# Altium PCB STM32 + RF + USB.PcbDoc
Units mil, origin at the board's own origin, x right, y up, seen from the top; angles counter-clockwise.
Board outline 2807.27 x 1237.86 mil, 2 copper layers (Top Layer, Bottom Layer); 43 components, 33 nets, 163 pads, 92 vias.
Unrouted connection lines stored in the file: 83.
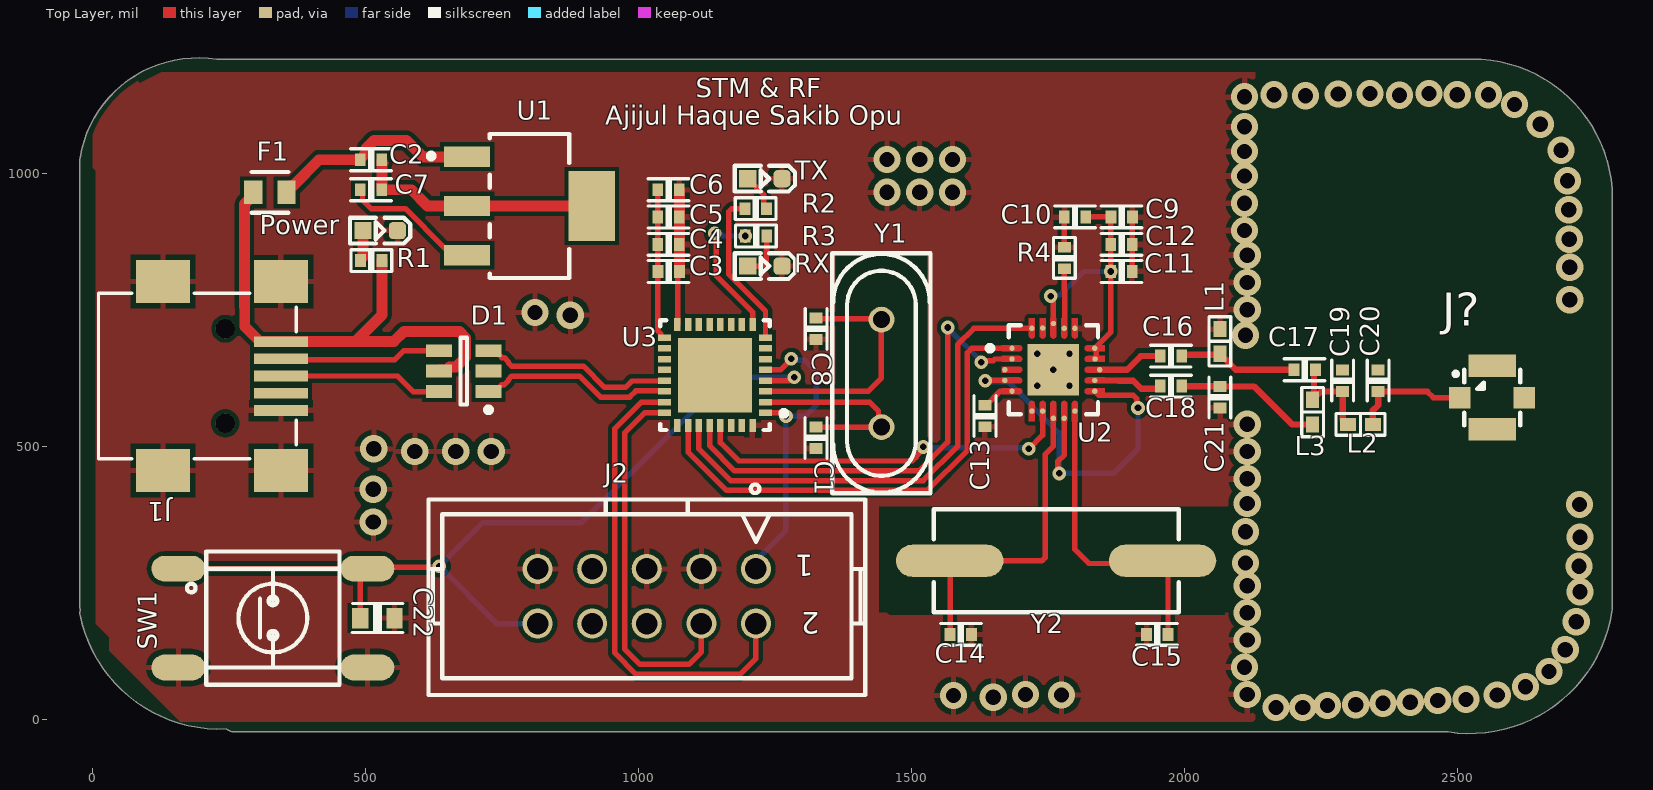
[diagram p0: Top Layer view]
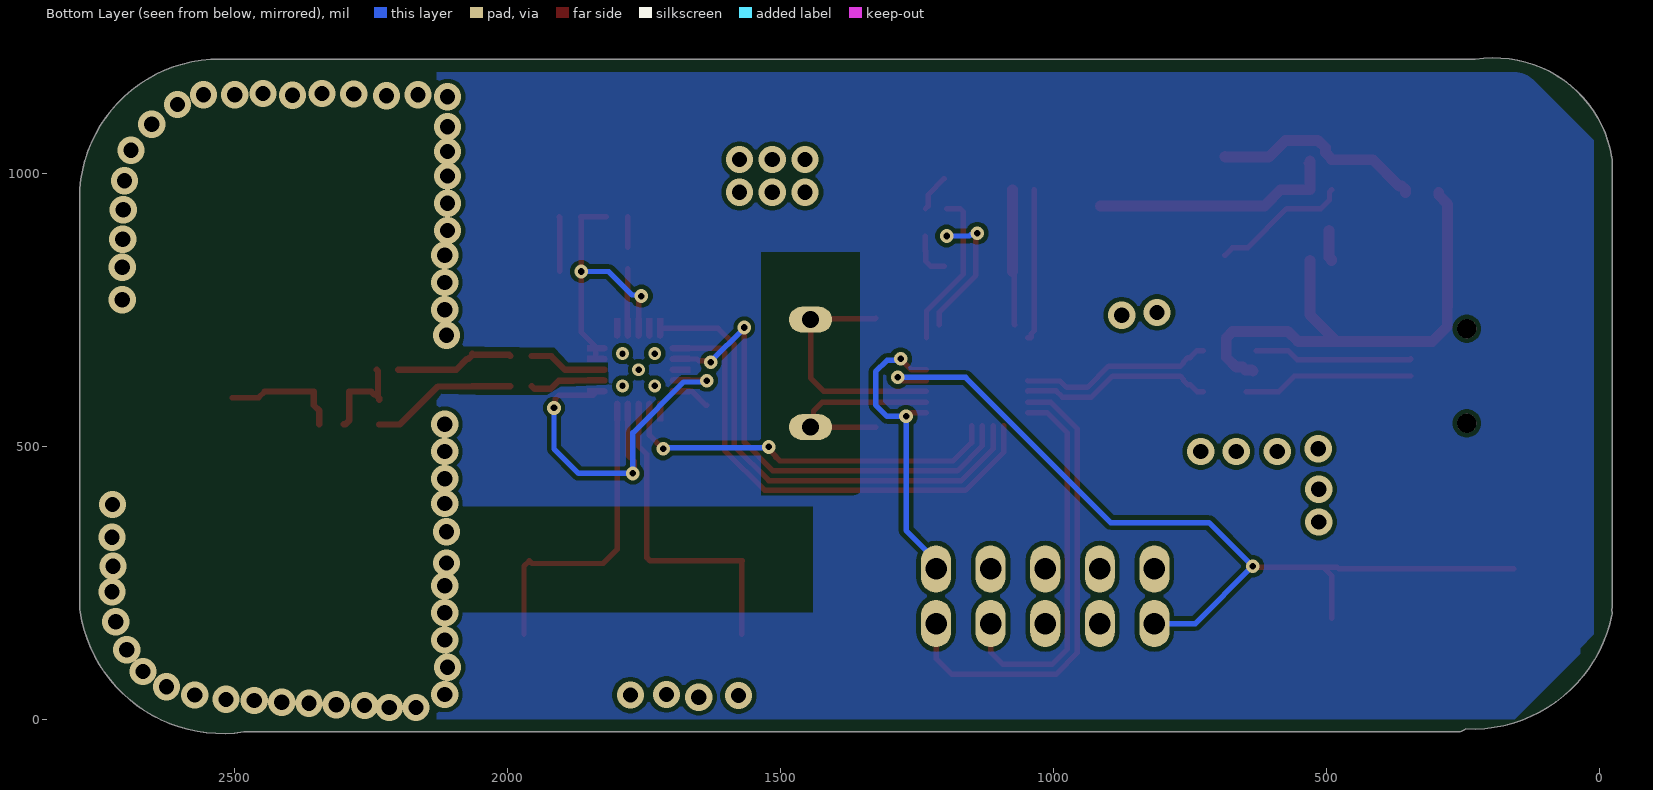
[diagram p1: Bottom Layer view, seen from below]

## Layer stack, top to bottom
Top Solder: solder mask 0.4, Solder Resist, Dk 3.5
Top Layer: signal copper 1.4
Dielectric 1: dielectric 12.6, FR-4, Dk 4.8
Bottom Layer: signal copper 1.4
Bottom Solder: solder mask 0.4, Solder Resist, Dk 3.5

## Board outline
-23.16,190.27 cw(c0,195) -23.1,200 cw(c0,205) -23.64,205 -23.64,1025 -23.31,1028.93 cw(c192.5,992.5) 226.92,1208.64 2509.13,1208.64 cw(c2527.5,952.5) 2783.57,971.77 2783.64,970 2783.64,200 2783.35,196.31 cw(c2522.5,237.5) 2483.19,-23.64 260,-23.64 cw(c260,0) 244.85,-18.15 cw(c232.5,242.5)

## Design rules (kind name [scope] priority, off if disabled: settings)
Clearance "Stitching GND" [IsStitchingVia and InNet('GND') vs (IsVia and (Not IsStitchingVia)) Or IsPad] p1: gap=5 ignorepadtopadclearanceinfootprint=TRUE
Clearance [All] p2: gap=8 ignorepadtopadclearanceinfootprint=TRUE
DiffPairsRouting [InDifferentialPair('NewDifferentialPair2')] p1: maxlimit=10 minlimit=8 mostfreqgap=8 toplayer_minwidth=10 toplayer_maxwidth=15 toplayer_prefwidth=10 bottomlayer_minwidth=10 bottomlayer_maxwidth=15 bottomlayer_prefwidth=10 maxuncoupledlength=500
PolygonConnect [All] p1: connectstyle=Relief reliefconductorwidth=10 reliefentries=4 polygonreliefangle="90 Angle" airgapwidth=10
RoutingVias [All] p1: holewidth=12 width=25 viastyle="Through Hole" minholewidth=12 minwidth=25 maxholewidth=12 maxwidth=25
SolderMaskExpansion [All] p1: expansion=4 istentingtop=FALSE
Width [All] p1: maxlimit=25 minlimit=8 preferedwidth=10
29 further rules are at their usual default settings.

## Classes and differential pairs
net class diff90: D_+ D_- USB_D_+ USB_D_-
differential pair NewDifferentialPair2: +D_+ -D_-
differential pair NewDifferentialPair1: +USB_D_+ -USB_D_-

## Components (designator, comment, footprint, x,y, rotation, side; value= is the part's Value field where it differs from the comment)
C1 "10uf" "CAP 0402_1005" 1324.76,515.38 r270 top value=100nF
C2 "10uf" "CAP 0402_1005" 510,1025 r180 top value=100nF
C3 "1uf" "CAP 0402_1005" 1055.38,820.24 r180 top value=100nF
C4 "100nf" "CAP 0402_1005" 1055,870 r180 top value=100nF
C5 "100nf" "CAP 0402_1005" 1055,920 r180 top value=100nF
C6 "100nf" "CAP 0402_1005" 1055,970 r180 top value=100nF
C7 "10uf" "CAP 0402_1005" 510,970 r180 top value=100nF
C8 "10uf" "CAP 0402_1005" 1325,715 r270 top value=100nF
C9 "10uf" "CAP 0402_1005" 1885.38,920.24 r180 top value=100nF
C10 "10nf" "CAP 0402_1005" 1799.62,919.76 r0 top value=100nF
C11 "10nf" "CAP 0402_1005" 1884.75,820.24 r180 top value=100nF
C12 "10nf" "CAP 0402_1005" 1885,870 r180 top value=100nF
C13 "100nf" "CAP 0402_1005" 1635,555 r90 top value=100nF
C14 "22pf" "CAP 0402_1005" 1590.25,154.76 r0 top value=100nF
C15 "22pf" "CAP 0402_1005" 1950.38,155.24 r180 top value=100nF
C16 "100pf" "CAP 0402_1005" 1975.38,665.24 r180 top value=100nF
C17 "1pf" "CAP 0402_1005" 2220.38,640.24 r180 top value=100nF
C18 "100pf" "CAP 0402_1005" 1975.38,610.24 r180 top value=100nF
C19 "1.8pf" "CAP 0402_1005" 2290.24,619.62 r90 top value=100nF
C20 "1.5pf" "CAP 0402_1005" 2355.24,619.89 r90 top value=100nF
C21 "1pf" "CAP 0402_1005" 2064.76,589.75 r270 top value=100nF
C22 "10uf" "CAP 0603_1608" 521.5,185 r0 top value=100nF
D1 "USBLC6-2SC6" STM-SOT23-6L_V 679.72,637.4 r180 top
F1 "F0603G0R10FNTR" FP-F0603G-MFG 324.49,965 r0 top value=2.4Ω
J1 "Mini USB 2.0 Type B" 65100516121 192.44,628.5 r270 top
J2 "CONN_JTAG" IDC_2X5 1015,225 r180 top
J? "UFL" "MOLEX SD-734120110" 2564,589 r270 top
L1 "1.2nH" "IND 0402_1005" 2064.98,693.16 r270 top
L2 "1.2nH" "IND 0402_1005" 2323.79,540.02 r180 top
L3 "1.2nH" "IND 0402_1005" 2235.02,561.21 r90 top
Power "LED SMD 0603 RED" LED_0603_BLUE 526.5,895 r0 top
R1 "1K" "RES 0402_1005" 510.32,840 r0 top
R2 "1K" "RES 0402_1005" 1214.68,935 r180 top
R3 "1K" "RES 0402_1005" 1215.32,885 r180 top
R4 "56k" "RES 0402_1005" 1780,844.68 r90 top value=1K
RX "LED SMD 0603 GREEN" LED_0603_GREEN 1231.5,830 r0 top
SW1 "Tactile 4PIN 6X6mm H4.5mm (SMD)" SWPBS_SPDT_6X6X5 330,185 r0 top
TX "LED SMD 0603 BLUE" LED_0603_RED 1231.5,990 r0 top
U1 "LM3940IMP-3.3/NOPB" FP-DCY0004A-MFG 800,940 r0 top
U2 "CC2500RGPR" FP-RGP0020C-MFG 1760,640 r0 top
U3 "STM32L432KBU6" FP-UFQFPN32-A0B8-MFG 1140,630 r180 top
Y1 "32kHz" "HC-49S THT" 1445,633.43 r270 top value=8.0MHZ
Y2 "25MHz" "HC-49S SMD" 1765,290 r180 top

## Footprints (in the part's own frame and the unit in brackets; to place one, negate y for a bottom-side part, rotate by r counter-clockwise, add the part's x,y. Pads: shape width x height; smd on the part's side, far side on the other; paste and mask are expansions set on the pad)
65100516121 [mm] "Mini USB 2.0 Type B SMT Horizontal 5 Contacts"
  rect 0.5x2.5 smd: 1(-1.6,3.875) 2(-0.8,3.875) 3(0,3.875) 4(0.8,3.875) 5(1.6,3.875)
  round 0.9 hole 0.9 unplated: M1(-2.2,1.275) M2(2.2,1.275)
  rect 2x2.5 smd: S1(-4.4,3.875) S2(4.4,3.875) S3(-4.4,-1.625) S4(4.4,-1.625)
  silkscreen extent -3.85,-4.62 3.85,4.58, body extent -4.8,-4.63 4.8,4.62, height 3.92
"CAP 0402_1005" [mm] "Chip Capacitor, 2-Leads, Body 1.02x0.51mm, IPC Medium Density"
  rect 0.5x0.6 smd: 1(-0.498,0.006) 2(0.502,0.006)
  silkscreen extent -0.94,-0.5 0.96,0.51, body extent -0.52,-0.27 0.48,0.25, height 0.52
"CAP 0603_1608" [mm] "Chip Capacitor, 2-Leads, Body 1.60x0.80mm, IPC Medium Density"
  rect 0.75x0.95 smd: 1(-0.8,0) 2(0.8,0)
  silkscreen extent -1.18,-0.67 1.19,0.68, body extent -0.8,-0.4 0.8,0.42, height 0.82
FP-DCY0004A-MFG [mm]
  rect 2.15x0.95 smd paste+0 mask+0: 1(-2.9,2.3) 2(-2.9,0) 3(-2.9,-2.3)
  rect 2.15x3.25 smd paste+0 mask+0: 4(2.9,0)
  silkscreen extent -4.7,-3.35 1.85,3.35, body extent -4.08,-3.45 4.08,3.45, height 0.25
FP-F0603G-MFG [mm]
  rect 0.85x1.1 smd paste+0 mask+0: 1(-0.775,0) 2(0.775,0)
  silkscreen extent -0.85,-0.95 0.85,0.95, body extent -0.8,-0.41 0.8,0.41, height 0.71
FP-RGP0020C-MFG [mm]
  round 0.252 smd paste-1000 mask+0: 1(-1.925,1) 2(-1.925,0.5) 3(-2.26,0) 4(-2.26,-0.5) 5(-1.925,-1) 6(-1,-1.925) 7(-0.5,-1.925) 8(0,-2.26) 9(0.5,-2.26) 10(1,-1.925) 11(1.925,-1) 12(1.925,-0.5) 13(2.15,0) 14(1.94,0.5) 15(1.925,1) 16(1,1.925) 17(0.5,1.925) 18(0,2.15) 19(-0.5,1.94) 20(-1,1.925)
  rect 2.4x2.4 smd paste-1000 mask+0: 21(0,0)
  Top Layer region: -2.4,1.14 -1.59,1.14 -1.536,1.129 -1.491,1.099 -1.461,1.054 -1.45,1 -1.45,1 -1.461,0.946 -1.491,0.901 -1.536,0.871 -1.59,0.86 -1.59,0.86 -2.4,0.86
  Top Layer region: -2.4,0.64 -1.59,0.64 -1.536,0.629 -1.491,0.599 -1.461,0.554 -1.45,0.5 -1.45,0.5 -1.461,0.446 -1.491,0.401 -1.536,0.371 -1.59,0.36 -1.59,0.36 -2.4,0.36
  Top Layer region: -2.4,0.14 -1.59,0.14 -1.536,0.129 -1.491,0.099 -1.461,0.054 -1.45,0 -1.45,0 -1.461,-0.054 -1.491,-0.099 -1.536,-0.129 -1.59,-0.14 -1.59,-0.14 -2.4,-0.14
  Top Layer region: -2.4,-0.36 -1.59,-0.36 -1.536,-0.371 -1.491,-0.401 -1.461,-0.446 -1.45,-0.5 -1.45,-0.5 -1.461,-0.554 -1.491,-0.599 -1.536,-0.629 -1.59,-0.64 -1.59,-0.64 -2.4,-0.64
  Top Layer region: -2.4,-0.86 -1.59,-0.86 -1.536,-0.871 -1.491,-0.901 -1.461,-0.946 -1.45,-1 -1.45,-1 -1.461,-1.054 -1.491,-1.099 -1.536,-1.129 -1.59,-1.14 -1.59,-1.14 -2.4,-1.14
  Top Layer region: -1.14,-2.4 -1.14,-1.59 -1.129,-1.536 -1.099,-1.491 -1.054,-1.461 -1,-1.45 -1,-1.45 -0.946,-1.461 -0.901,-1.491 -0.871,-1.536 -0.86,-1.59 -0.86,-1.59 -0.86,-2.4
  Top Layer region: -0.64,-2.4 -0.64,-1.59 -0.629,-1.536 -0.599,-1.491 -0.554,-1.461 -0.5,-1.45 -0.5,-1.45 -0.446,-1.461 -0.401,-1.491 -0.371,-1.536 -0.36,-1.59 -0.36,-1.59 -0.36,-2.4
  Top Layer region: -0.14,-2.4 -0.14,-1.59 -0.129,-1.536 -0.099,-1.491 -0.054,-1.461 0,-1.45 0,-1.45 0.054,-1.461 0.099,-1.491 0.129,-1.536 0.14,-1.59 0.14,-1.59 0.14,-2.4
  Top Layer region: 0.36,-2.4 0.36,-1.59 0.371,-1.536 0.401,-1.491 0.446,-1.461 0.5,-1.45 0.5,-1.45 0.554,-1.461 0.599,-1.491 0.629,-1.536 0.64,-1.59 0.64,-1.59 0.64,-2.4
  Top Layer region: 0.86,-2.4 0.86,-1.59 0.871,-1.536 0.901,-1.491 0.946,-1.461 1,-1.45 1,-1.45 1.054,-1.461 1.099,-1.491 1.129,-1.536 1.14,-1.59 1.14,-1.59 1.14,-2.4
  Top Layer region: 2.4,-1.14 1.59,-1.14 1.536,-1.129 1.491,-1.099 1.461,-1.054 1.45,-1 1.45,-1 1.461,-0.946 1.491,-0.901 1.536,-0.871 1.59,-0.86 1.59,-0.86 2.4,-0.86
  Top Layer region: 2.4,-0.64 1.59,-0.64 1.536,-0.629 1.491,-0.599 1.461,-0.554 1.45,-0.5 1.45,-0.5 1.461,-0.446 1.491,-0.401 1.536,-0.371 1.59,-0.36 1.59,-0.36 2.4,-0.36
  Top Layer region: 2.4,-0.14 1.59,-0.14 1.536,-0.129 1.491,-0.099 1.461,-0.054 1.45,0 1.45,0 1.461,0.054 1.491,0.099 1.536,0.129 1.59,0.14 1.59,0.14 2.4,0.14
  Top Layer region: 2.4,0.36 1.59,0.36 1.536,0.371 1.491,0.401 1.461,0.446 1.45,0.5 1.45,0.5 1.461,0.554 1.491,0.599 1.536,0.629 1.59,0.64 1.59,0.64 2.4,0.64
  Top Layer region: 2.4,0.86 1.59,0.86 1.536,0.871 1.491,0.901 1.461,0.946 1.45,1 1.45,1 1.461,1.054 1.491,1.099 1.536,1.129 1.59,1.14 1.59,1.14 2.4,1.14
  Top Layer region: 1.14,2.4 1.14,1.59 1.129,1.536 1.099,1.491 1.054,1.461 1,1.45 1,1.45 0.946,1.461 0.901,1.491 0.871,1.536 0.86,1.59 0.86,1.59 0.86,2.4
  Top Layer region: 0.64,2.4 0.64,1.59 0.629,1.536 0.599,1.491 0.554,1.461 0.5,1.45 0.5,1.45 0.446,1.461 0.401,1.491 0.371,1.536 0.36,1.59 0.36,1.59 0.36,2.4
  Top Layer region: 0.14,2.4 0.14,1.59 0.129,1.536 0.099,1.491 0.054,1.461 0,1.45 0,1.45 -0.054,1.461 -0.099,1.491 -0.129,1.536 -0.14,1.59 -0.14,1.59 -0.14,2.4
  Top Layer region: -0.36,2.4 -0.36,1.59 -0.371,1.536 -0.401,1.491 -0.446,1.461 -0.5,1.45 -0.5,1.45 -0.554,1.461 -0.599,1.491 -0.629,1.536 -0.64,1.59 -0.64,1.59 -0.64,2.4
  Top Layer region: -0.86,2.4 -0.86,1.59 -0.871,1.536 -0.901,1.491 -0.946,1.461 -1,1.45 -1,1.45 -1.054,1.461 -1.099,1.491 -1.129,1.536 -1.14,1.59 -1.14,1.59 -1.14,2.4
  silkscreen extent -3.07,-2.07 2.07,2.07, body extent -2.5,-2.5 2.5,2.5, height 0.25
FP-UFQFPN32-A0B8-MFG [mm]
  rect 0.6x0.3 smd paste+0 mask+0: 1(-2.35,1.75) 2(-2.35,1.25) 3(-2.35,0.75) 4(-2.35,0.25) 5(-2.35,-0.25) 6(-2.35,-0.75) 7(-2.35,-1.25) 8(-2.35,-1.75) 17(2.35,-1.75) 18(2.35,-1.25) 19(2.35,-0.75) 20(2.35,-0.25) 21(2.35,0.25) 22(2.35,0.75) 23(2.35,1.25) 24(2.35,1.75)
  rect 0.3x0.6 smd paste+0 mask+0: 9(-1.75,-2.35) 10(-1.25,-2.35) 11(-0.75,-2.35) 12(-0.25,-2.35) 13(0.25,-2.35) 14(0.75,-2.35) 15(1.25,-2.35) 16(1.75,-2.35) 25(1.75,2.35) 26(1.25,2.35) 27(0.75,2.35) 28(0.25,2.35) 29(-0.25,2.35) 30(-0.75,2.35) 31(-1.25,2.35) 32(-1.75,2.35)
  rect 3.45x3.45 smd paste+0 mask+0: 33(0,0)
  silkscreen extent -3.33,-2.55 2.55,2.55, body extent -2.75,-2.75 2.75,2.75, height 0.25
"HC-49S SMD" [mm] "SMD crystal resonator, ABL, ABLS, HC-49, HC49 11X4.5MM"
  oval 5x1.5 smd: 1(-4.953,0) 2(4.953,0)
  Top Layer pour cut-out: -5.715,1.524 5.715,1.524 5.715,-1.778 5.588,-1.651 -5.715,-1.651
  silkscreen extent -5.7,-2.4 5.7,2.4, body extent -6.4,-2.41 6.4,2.42, height 4.3
"HC-49S THT" [mm] "Crystal THT HC49S"
  round 1.2 / inner oval 1.2x2 / far side oval 1.2x2 hole 0.8: 1(-2.5,0)
  round 1.2 / inner round 1.2 / far side oval 1.2x2 hole 0.8: 2(2.5,0)
  Top Layer pour cut-out: 3.1,1.5 3.1,1.6 3.5,1.6 3.5,-1.5 -3.5,-1.5 -3.5,1.5
  silkscreen extent -5.59,-2.29 5.59,2.29, body extent -5.67,-2.32 5.67,2.33, height 3.6
IDC_2X5 [mm] "IDC, HEADER BOX 2X5, 10p, 2.54mm pitch"
  round 1.4 / inner round 1.4 / far side oval 1.4x2.2 hole 1 mask+0.1: 1(-5.08,-1.27) 2(-5.08,1.27) 3(-2.54,-1.27) 4(-2.54,1.27) 5(0,-1.27) 6(0,1.27) 7(2.54,-1.27) 8(2.54,1.27) 9(5.08,-1.27) 10(5.08,1.27)
  silkscreen extent -10.16,-5.2 10.16,4.6, body extent -10.18,-4.42 10.18,4.75, height 9.13
"IND 0402_1005" [mm] "Inductor, 2-Leads, Body 1.02x0.51mm, IPC Medium Density"
  rect 0.75x0.6 smd: 1(-0.546,0.001) 2(0.604,0.001)
  silkscreen extent -1.11,-0.51 1.17,0.51, body extent -0.5,-0.3 0.5,0.3, height 0.6
LED_0603_BLUE [mm] "LED SMD 0603, BLUE"
  rect 0.8x0.8 smd mask+0.075: 1(-0.8,0)
  rrect50% 0.8x0.8 smd mask+0.075: 2(0.8,0)
  silkscreen extent -1.4,-0.6 1.4,0.6, body extent -0.8,-0.4 0.8,0.4, height 0.5
LED_0603_GREEN [mm] "LED SMD 0603, GREEN"
  rect 0.8x0.8 smd mask+0.075: 1(-0.8,0)
  rrect50% 0.8x0.8 smd mask+0.075: 2(0.8,0)
  silkscreen extent -1.4,-0.6 1.4,0.6, body extent -0.8,-0.4 0.8,0.4, height 0.5
LED_0603_RED [mm] "LED SMD 0603, RED"
  rect 0.8x0.8 smd mask+0.075: 1(-0.8,0)
  rrect50% 0.8x0.8 smd mask+0.075: 2(0.8,0)
  silkscreen extent -1.4,-0.6 1.4,0.6, body extent -0.8,-0.4 0.8,0.4, height 0.5
"MOLEX SD-734120110" [mm]
  rect 1.05x2.2 smd: G(-1.475,0) G(1.475,0)
  rect 1x1 smd: G(0,1.5) S(0,-1.5)
  silkscreen extent -1.3,-1.8 1.3,1.3, body extent -1.5,-1.54 1.5,1.54, height 1.3
"RES 0402_1005" [mm] "Chip Resistor, 2-Leads, Body 1.0x0.5mm, IPC Medium Density"
  rect 0.5x0.6 smd: 1(-0.5,0) 2(0.5,0)
  silkscreen extent -0.94,-0.51 0.96,0.51, body extent -0.5,-0.25 0.5,0.25, height 0.35
STM-SOT23-6L_V [mm] "SOT23, 6-Leads, Body 3.05x1.75mm, Pitch 0.95mm"
  rect 1.2x0.6 smd: 1(-1.15,0.95) 2(-1.15,0) 3(-1.15,-0.95) 4(1.15,-0.95) 5(1.15,0) 6(1.15,0.95)
  silkscreen extent -1.28,-1.55 0.15,1.92, body extent -1.6,-1.53 1.6,1.53, height 1.45
SWPBS_SPDT_6X6X5 [mm] "SWITCH, PUSHBUTTON, SMD, SPDT, 6X6mm 4PIN"
  oval 2.5x1.2 smd mask+0.1: 1(-4.4,2.3) 2(-4.4,-2.3) 3(4.4,-2.3) 4(4.4,2.3)
  silkscreen extent -4,-3.1 3.1,3.1, body extent -5,-3 5,3, height 5.07

## Part data
C1 C2 C3 C4 C5 C6 C7 C8 C9 C10 C11 C12 C13 C14 C15 C16 C17 C18 C19 C20 C21: library part "Cap 0402", "SMT Capacitor"
C22: library part "Cap 0603", "SMT Capacitor"
D1: library part CMP-2000-05378-1, "Very low capacitance ESD protection, 3.5 pF, -40 to 125 degC, 6-Pin SOT23, RoHS, Tape and Reel", Capacitance Value=3.5pF, Clamping Voltage=17V, Leakage Current=0.15uA, Manufacturer=STMicroelectronics, Operating Temp Range=-40Cto125C, Operating Temperature Classification=Automotive, Operating Temperature Max Deg. C=125C, Operating Temperature Min Deg. C=-40C, Package / Case=SOT-23, Package Description="6-Pin Small Outline Transistor, Body 2.925 x 1.625 mm, Pitch 0.95 mm", Package Reference=SOT23-6L, Peak Pulse Current=5A, Reverse Breakdown Voltage=6V, Reverse Stand-off Voltage=5V, Test Current (It)=1mA, Clamping Voltage (Max)=17V, Configuration=Dual, Datasheet URL=http://www.st.com/st-web-ui/static/active/en/resource/technical/document/datasheet/CD00050750.pdf, Datasheet Version="Rev. 5, 10/2011", Direction Type=Uni-Directional, Leakage Current (Max)=0.15uA, Manufacturer URL=http://www.st.com/, Mounting=SurfaceMount, Mounting Style=SurfaceMount, Number of Elements=1, Packaging=TapeandReel, Pin Count=6, Polarity=Uni-Directional, Product Depth (mm)=1.75mm, Product Height (mm)=1.3mm, Product Length (mm)=3.05mm, Rad Hardened=No, Suppressor Type=DiodeArrays, Working Voltage=5V, Working Voltage (Max)=5V
F1: library part CMP-04585-000001-1, "FUSE BOARD MNT 100MA 32VDC 0603", Fuse Current=0.1A, Fuse Voltage Drop=300mV, Manufacturer="AVX Corporation", Package=F0603G, Resistance=2.4Ω, Temperature="-55°C to +125°C", Temperature Range High=+125°C, Temperature Range Low=-55°C, Voltage Rating=63V, Automotive=No, Category=Fuse, ComponentLink2Description=Datasheet, ComponentLink2URL=http://datasheets.avx.com/AccuGuardLC_0402.pdf, Device Class L1="Circuit Protection", Device Class L2=Fuses, Device Class L3=unset, Digikey Description="FUSE BOARD MNT 100MA 32VDC 0603", Fuse Blow Speed=Fast, Fuse I2T=0.000007A2Sec, Height=0.71mm, Ipc Land Pattern Name=CAPC16081X61, Lead Free=Yes, Manufacturer Part Number=F0603G0R10FNTR, Mouser Description="Fuse Chip Fast Acting 0.1A 32V SMD Solder Pad 1.6 x 0.8 mm T/R", Octopart=https://octopart.com/f0603g0r10fntr-avx-21046322, RoHS=TRUE
J1: library part "Mini USB 2.0 Type B Horizontal (SMD) 65100516121", "Mini USB 2.0 Type B Horizontal SMT 5 Contacts WR-COM", Operating Temperature="-40 to 105 degC", PartNumber=65100516121, Rated Current="1 A", ComponentLink1Description=Manufacturer, ComponentLink1URL=http://www.we-online.de, ComponentLink2Description=Datasheet, ComponentLink2URL=http://katalog.we-online.de/em/datasheet/65100516121.pdf, Gender=Female, Interface Type="Mini USB 2.0 Type B", Mounting Technology=SMT, Orientation=Horizontal, Packaging=Tray, Published Date="May 2018", Publisher="Wurth Elektronik"
J2: library part JTAG_ARM_10, "CONN, JTAG, ARM, 10P"
J?: library part "UFL MOLEX SD-734120110", PartNumber="MOLEX SD-734120110"
L1 L2 L3: library part "Ind 0402", "SMT Inductor"
R1 R2 R3 R4: library part "Res 0402", "SMT Resistor"
SW1: "Tactile Switch SPST-NO Top Actuated Surface Mount", PartNumber="PTS645SM43SMTR92 LFS"
U1: library part CMP-0062-01788-4, "IC REG LINEAR 3.3V 1A SOT223-4", Case/Package=SOT-223, Current Rating=1A, Dropout Voltage=500mV, Max Input Voltage=7.5V, Max Operating Temperature=125°C, Max Output Voltage=3.3V, Min Input Voltage=4.5V, Min Operating Temperature=-40°C, Package Quantity=1000, Quiescent Current=15mA, Contact Plating=Tin, Height=1.6mm, Lead Free="Lead Free", Length=6.5mm, Max Output Current=1A, Max Supply Voltage=7.5V, Min Supply Voltage=4.5V, Mount="Surface Mount", Nominal Output Voltage=3.3V, Number Of Outputs=1, Number of Pins=4, Number of Regulators=1, Output Configuration=Positive, Output Current=1A, Output Type=Fixed, Output Voltage=3.3V, Packaging="Tape and Reel", Polarity=Positive, Radiation Hardening=No, REACH SVHC="No SVHC", Series=-, Termination=SMD/SMT, Width=3.56mm
U2: library part CMP-04924-000028-1, "IC RF TXRX ISM>1GHZ 20VFQFN", Case/Package=VQFN, Current - Receiving=19.6mA, Current - Transmitting=21.5mA, Frequency=2.4GHz, Max Frequency=2.4835GHz, Max Operating Temperature=85°C, Max Supply Voltage=3.6V, Min Operating Temperature=-40°C, Min Supply Voltage=1.8V, Package Quantity=3000, Contact Plating=Gold, Data Rate=500Kbps, Density=0B, Depth=4.15mm, Interface=SPI, Lead Free="Lead Free", Length=4.15mm, Mount="Surface Mount", Number of Pins=20, Number of Receivers=1, Number of Transmitters=1, Packaging="Tape and Reel", REACH SVHC="No SVHC", RoHS Compliant=Yes, Sensitivity=-104dBm
U3: library part CMP-12105-000014-1, "IC MCU 32BIT 128KB FLASH 32QFPN", Ambient Temperature Range High=+85°C, Ambient Temperature Range Low=-40°C, Frequency=80MHz, Manufacturer=STMicroelectronics, Max Junction Temp=+105°C, Max Supply Voltage=3.6V, Min Supply Voltage=1.62V, Package=UFQFPN32-A0B8, Temperature="-40°C to +85°C", Automotive=No, Category=IC, ComponentLink2Description=Datasheet, ComponentLink2URL=https://www.st.com/resource/en/datasheet/stm32l432kb.pdf, Core Architecture="ARM Cortex-M4", Data Bus Width=32bits, Device Class L1="Integrated Circuits (ICs)", Device Class L2="Embedded Processors and Controllers", Device Class L3=Microcontrollers, Digikey Description="IC MCU 32BIT 128KB FLASH 32QFPN", Height=0.6mm, Interface=I2C,SPI,UART,USART,USB,IrDA, Ipc Land Pattern Name=QFN50P500X500X55-32, Lead Free=Yes, Manufacturer Part Number=STM32L432KBU6, Memory Size=128KBytes, Memory Type=FLASH, Number Of A/D Converters=1, Number Of Adc Channels=10, Number Of Cores=1, Number Of I2C Channels=2, Number Of I/Os=26, Number Of Spi Channels=2, Number Of Timers/Counters=8, Number Of Uart Channels=1, Octopart=https://octopart.com/stm32l432kbu6-stmicroelectronics-74568735, Ram Size=64KBytes, RoHS=TRUE, Temperature Range High=+85°C, Temperature Range Low=-40°C
Y1: library part "Crystal HC-49S THD", "THT Crystal"
Y2: library part "Crystal HC-49S SMD 25MHz", "SMT Crystal", PartNumber=ABLS-25.000MHZ-B2F-T

## Via types
v1: diameter 50, hole 28, Top Layer to Bottom Layer, 72 vias
v2: diameter 25, hole 12, Top Layer to Bottom Layer, 15 vias
v3: diameter 23.62, hole 11.81, Top Layer to Bottom Layer, 5 vias

## Nets (pads, with @x,y where several pads share a name; then routed paths per layer and width w, separated by ;. In a path a pad name is that pad's centre, name@x,y a point inside that pad or via, vN(x,y) a via of type N, cw(c..) or ccw(c..) an arc to the next point about the centre after c; other vN are vias at no path point)
+3.3V: C3.2 C4.2 C5.2 C6.2 C7.2 C9.2 C10.2 C11.2 C12.2 J2.1 U1.3 U2.4 U2.9 U2.11 U2.14 U2.15 U2.18 U3.1 U3.5 U3.17 | length 2356.4
  Top Layer w10: C7.2 494.18,965.84 494.18,950.82 510,935 572.47,935 644.32,863.15 672.13,863.15 U1.3 ; C6.2 1035.44,969.57 1035.44,710.94 1040.67,705.71 1040.67,699.8 1041.57,698.9 U3.17 ; U3.1 1259.35,561.1 1265.94,554.51 v2(1270,554.51) ; U3.5 1259.84,639.84 v2(1280,660) ; v2(1635,620) 1645,620 1645.32,620.32 U2.4 ; v2(1755,775) 1755,770.94 1760,765.94 U2.18 ; v2(1770.5,450) 1767.87,452.63 1767.87,471.93 1780,484.06 1780,560 ; C10.2 C9.2 1865.44,919.81 1865.44,869.95 1865.12,869.64 1865.12,820.12 v2(1865,820) 1865,708.58 U2.15@1838.54,682.13 ; U2.11 1843.42,593 1906.54,593 1912.83,586.72 1912.83,572.17 v2(1915,570) ; U2.15 U2.15@1838.54,682.13 ; U2.14 1838.54,661.87 U2.15@1838.54,682.13
  Bottom Layer w10: J2.1 1215,290.75 1270,345.75 v2(1270,554.51) 1304.51,554.51 1325.5,575.5 1325.5,636.53 1304.9,657.13 1282.87,657.13 v2(1280,660) ; v2(1635,620) 1637.5,617.5 1677.5,617.5 1770.5,524.5 v2(1770.5,450) 1870,450 1915,495 v2(1915,570) ; v2(1755,775) 1756.95,776.95 1771.95,776.95 1815,820 v2(1865,820)
+5: D1.5 F1.1 J1.1 R1.2 | length 945.3
  Top Layer w20: F1.1 293.98,960.08 277.79,943.89 277.79,754.91 278.35,754.34 278.35,719.09 305.94,691.5 J1.1 481.5,691.5 ; R1.2 530,740 481.5,691.5 ; D1.5 636.26,639.21 648.07,639.21 653.85,644.99 665.53,644.99 683.38,662.84 683.38,698.28 671.66,710 570,710 551.5,691.5 481.5,691.5
CS: U2.7 U3.29 | length 705.1
  Top Layer w10: U3.29 1149.84,506.53 1183.58,472.79 1501.25,472.79 1508.32,479.86 1508.32,481.24 1521.51,494.43 v2(1521.51,498.49) ; v2(1715,495) 1740.32,520.32 U2.7
  Bottom Layer w10: v2(1521.51,498.49) 1523.26,496.74 1713.26,496.74 v2(1715,495)
D_+: D1.1 U3.22 | length 356.8
  Top Layer w10: D1.1 736.81,600 749.4,612.59 754.01,612.59 761.62,620.21 761.62,622.54 767.48,628.4 891.6,628.4 930.27,589.73 983.45,589.73 995.04,601.31 1030.22,601.31 1030.28,601.25 1046.7,601.25 U3.22
D_-: D1.3 U3.21 | length 356.8
  Top Layer w10: D1.3 736.81,674.8 749.4,662.21 754.01,662.21 761.62,654.6 761.62,652.26 767.48,646.4 899.05,646.4 937.73,607.73 976,607.73 987.58,619.31 1030.22,619.31 1030.28,619.38 1046.7,619.38 U3.21
GND: C1.2 C3.1 C4.1 C5.1 C6.1 C8.2 C9.1 C10.1 C11.1 C12.1 C13.1 C14.2 C15.2 C19.2 C20.2 C21.2 C22.2 D1.2 J1.5 J1.S1 J1.S2 J1.S3 J1.S4 J2.3 J2.5 J2.9 J?.G L1.1 Power.2 R4.2 RX.2 SW1.2 SW1.3 TX.2 U2.16 U2.19 U2.21 U3.16 U3.32 | length 404.9
  Top Layer w10: U3.16 1071.88,723.3 1071.88,816.88 C3.1 ; R4.2 C10.1 ; C11.1 1904.49,820.12 1904.49,869.64 C12.1 1904.81,869.95 1904.81,919.81 C9.1
  Top Layer w20: C6.1 C5.1 C4.1 1074.62,822.04 1075,821.65 C3.1
  other v1: 2168,21 2217,21 2262,25 2314,26 2364,29 2414,31 2464,34 2516,36 1650,40 1577,43 1775,44 2573,44 1709,45 2115,45 2625,59 2668,87 2110,95 2698,127 2115,145 2718,178 2115,195 2725,233 2115,244 2723,280 2112,286 2725,333 2112,343 514,361 2115,395 514,421 2115,440 590,490 665,490 730,490 2115,490 515,495 2115,540 2112,703 875,740 810,745 2115,750 2115,800 2706,828 2115,850 2705,879 2110,895 2704,933 2110,945 1455,965 1515,965 1575,965 2702,986 2110,995 1455,1025 1515,1025 1575,1025 2110,1040 2690,1042 2110,1085 2652,1090 2605,1126 2110,1140 2222,1142 2394,1143 2164,1144 2500,1144 2557,1144 2282,1145 2340,1146 2448,1146
  other v3: 1730.47,610.47 1789.53,610.47 1760,640 1730.47,669.53 1789.53,669.53
MISO: U2.20 U3.27 | length 901.4
  Top Layer w10: U3.27 1110.47,494.98 1168.67,436.79 1521.33,436.79 1584.34,499.79 1584.34,685.91 1614.21,715.79 U2.20
MOSI: U2.2 U3.28 | length 871.6
  Top Layer w10: U3.28 1130.16,500.75 1176.12,454.79 1513.88,454.79 1566.34,507.25 v2(1566.34,717.4) ; v2(1627.84,653.87) 1630.71,656.74 1649.69,656.74 1652.64,659.68 U2.2
  Bottom Layer w10: v2(1566.34,717.4) 1566.34,716.38 1627.84,654.88 v2(1627.84,653.87)
NetC2_1: C2.1 C7.1 U1.2 U1.4 | length 460.7
  Top Layer w10: C2.1 529.62,1022.8 534.46,1017.95 C2.1@536.43,1017.95
  Top Layer w20: C2.1@529.62,1022.8 C7.1 583.74,969.76 613.5,940 U1.2 U1.4
NetC2_2: C2.2 F1.2 U1.1 | length 390
  Top Layer w20: F1.2 355,969.92 361.73,976.65 366.65,976.65 414.76,1024.76 C2.2 ; C2.2@490.41,1026.57 501.78,1037.94 501.78,1046.78 515,1060 575,1060 605,1030 685.28,1030 U1.1
NetC13_2: C13.2 U2.5 | length 60.2
  Top Layer w10: C13.2 1636.73,574.75 1662.61,600.63 U2.5
NetC14_1: C14.1 U2.8 Y2.2 | length 574.1
  Top Layer w10: C14.1 1570.63,289.37 Y2.2 1739.14,290 1745,295.86 1745,485 1760,500 U2.8
NetC15_1: C15.1 U2.10 Y2.1 | length 566
  Top Layer w10: U2.10 1799.37,310.63 1825,285 1955,285 Y2.1 1970,280 C15.1
NetC16_1: C16.1 C17.2 L1.2 | length 221.3
  Top Layer w11.55: C16.1 1997.18,667.18 2062.82,667.18 L1.2 2065,666.42 2071.81,659.61 2074.76,659.61 2094.37,640 C17.2
NetC17_1: C17.1 C19.1 L2.2 L3.2 | length 179.4
  Top Layer w11.55: L3.2 2235,587.95 L3.2@2237.5,590.45 ; C17.1 2237.5,637.5 L3.2@2237.5,590.45 ; L2.2 2297.05,540 2290,547.05 C19.1 2250,600 2244.76,594.76 2241.81,594.76 L3.2@2237.5,590.45
NetC18_1: C18.1 C21.1 L3.1 | length 269.1
  Top Layer w11.55: C18.1 1995.32,609.68 2064.68,609.68 C21.1 2127.63,609.37 2197.28,539.72 L3.1
NetC20_1: C20.1 J?.S L2.1 | length 218.9
  Top Layer w10: 2444.72,600.28 2456,589 J?.S
  Top Layer w11.55: L2.1 2345.28,565.28 2355,575 C20.1 2444.72,600.28
NetPower_1: Power.1 R1.1 | length 56.8
  Top Layer w20: R1.1 490.63,841.65 495,846.02 Power.1
NetR2_1: R2.1 TX.1 | length 69.2
  Top Layer w10: TX.1 1229.53,960.47 1229.53,939.84 R2.1
NetR3_1: R3.1 RX.1 | length 84.1
  Top Layer w10: RX.1 1225,830 1234.24,839.24 1234.24,857.43 1235,858.19 R3.1
NetR4_1: R4.1 U2.17 | length 109.8
  Top Layer w10: U2.17 1780.5,716.6 1780.5,785.56 1780,786.06 R4.1
PA2: R2.2 U3.8 | length 290.6
  Top Layer w10: R2.2 1170.86,935 1165,929.14 1165,815.12 1232.52,747.6 U3.8
PA3: R3.2 U3.9 | length 256.4
  Top Layer w10: v2(1139.5,890) 1142,887.5 1142,812.66 1208.9,745.77 U3.9 ; R3.2@1195.63,883.03 v2(1195.63,885)
  Bottom Layer w10: v2(1139.5,890) 1142.37,887.13 1151.56,887.13 1153.69,885 v2(1195.63,885)
PC14: C1.1 U3.2 Y1.2 | length 365.3
  Top Layer w10: U3.2 1233.3,580.01 1423.66,580.01 1439.52,564.14 1439.52,540.48 Y1.2 C1.1
PC15: C8.1 U3.3 Y1.1 | length 450.4
  Top Layer w10: U3.3 1420.47,600.47 1445,625 Y1.1 1443.62,733.23 1326.62,733.23 C8.1
RESET: C22.1 J2.10 SW1.1 SW1.4 U3.4 | length 1666.7
  Top Layer w10: SW1.1 477.64,275.55 479.86,277.78 SW1.4@505.45,277.78 ; C22.1 490,262.32 SW1.4 SW1.4@505.45,277.78 ; v2(635,280) 632.78,277.78 SW1.4@505.45,277.78 ; U3.4 1276.1,620.16 1281.91,625.97 v2(1285,625.97)
  Bottom Layer w10: J2.10 740,175 v2(635,280) 715,360 895,360 1160.97,625.97 v2(1285,625.97)
  Bottom Layer w20: J2.10 J2.10@815,190.75
RF_N: C16.2 U2.13 | length 121.3
  Top Layer w11.55: U2.13 1895,640 1920,665 C16.2
RF_P: C18.2 U2.12 | length 128.3
  Top Layer w11.55: U2.12 1879.68,620.32 1880,620 1906.1,620 1921.1,605 1950.79,605 1955.63,609.84 C18.2
SCK: U2.1 U3.26 | length 883.5
  Top Layer w10: U3.26 1090.79,489.21 1161.21,418.79 1528.79,418.79 1602.34,492.34 1602.34,671.08 1610.63,679.37 U2.1
SWCLK: J2.4 U3.24 | length 698
  Top Layer w10: U3.24 1011.1,561.1 974.44,524.44 974.44,128.56 1003,100 1092,100 1115,123 J2.4
SWDIO: J2.2 U3.23 | length 872.9
  Top Layer w10: U3.23 1046.7,580.01 1004.55,580.01 956.44,531.9 956.44,121.1 995.54,82 1186.14,82 1215,110.86 J2.2
USB_D_+: D1.6 J1.3 | length 313.5
  Top Layer w10: J1.3 558.5,628.5 587.01,600 D1.6@646.65,600
USB_D_-: D1.4 J1.2 | length 291.6
  Top Layer w10: J1.2 347,658 553,658 570,675 D1.4@628.78,675
pads on no net: J1.4 J1.M1 J1.M2 J2.6 J2.7 J2.8 U2.3 U2.6 U3.6 U3.7 U3.10 U3.11 U3.12 U3.13 U3.14 U3.15 U3.18 U3.19 U3.20 U3.25 U3.30 U3.31 U3.33
copper on no net:
  other v1: 2724,393 2706,768

## Polygon pours and split planes (outlines as drawn)
GND on Top Layer "GND_L01_P000" (solid, remove dead copper, pour order 0): 85,1165 105,1185 2130,1185 2130,0 2125,-5 160,-5 30,125 30,150 5,175 5,1005 0,1010 0,1070 cw(c182.5,1002.5) 115,1185 125,1185
no net on Bottom Layer "NONET_L02_P002" (solid, pour order 2): 2130,1185 2130,0 155,0 35,120 35,130 10,155 10,1060 120.86,1170.86 cw(c155,1136.72) 155,1185

## Other copper
Top Layer:
  pour cut-out: 1360,850 1530,850 ccw(c1532.93,847.07) 1528.79,847.07 1528.79,418.79 1362.93,418.79 cw(c1362.93,422.93) 1360,420
  pour cut-out: 1450,385 2070,385 2075,380 2075,190 1460,190 1450,200
Bottom Layer:
  pour cut-out: 1355,855 1535,855 1535,410 1367.07,410 cw(c1367.07,427.07) 1355,415 1355,850
Multi-Layer:
  pour cut-out: 1889,654 1914,680 2042,682 2092,683 2145,683 2145,596 2121,596 2029,593 1928,593 1903,609 1874,610 1814,613 1816,654 1814,613 1816,654
  pour cut-out: 1440,195 2095,195 2095,390 1440,390 1440,375

## Silkscreen, mask and mechanical layers (free items; w line width, h text height)
Top Overlay:
  text "STM & RF" at 1105,1127 h60
  text "Ajijul Haque Sakib Opu" at 939,1077.32 h60
Mechanical 1:
  lines w47.24: 0,195 ccw(c232.5,242.5) 280,10 ; 0,205 0,1025 ; 5,1030 cw(c197.5,997.5) 230,1190 ; 225,1185 2510,1185 cw(c2527.5,952.5) 2760,970 2760,200 cw(c2522.5,237.5) 2485,0 260,0

## Text inside footprints (layer, text, board x,y; h text height)
J2: Top Overlay "1" at 1321,301 h39.37 r180; Top Overlay "2" at 1332,196 h39.37 r180